# Altium PCB PCB1.PcbDoc (part 1 of 4)
Units mm, origin at the board's own origin, x right, y up, seen from the top; angles counter-clockwise.
Board outline 125 x 60 mm, 4 copper layers (Top Copper, Top Ref, Botton Ref, Bottom Copper), stack 1.586 mm thick; 166 components, 89 nets, 449 pads, 336 vias.
Unrouted connection lines stored in the file: 10.
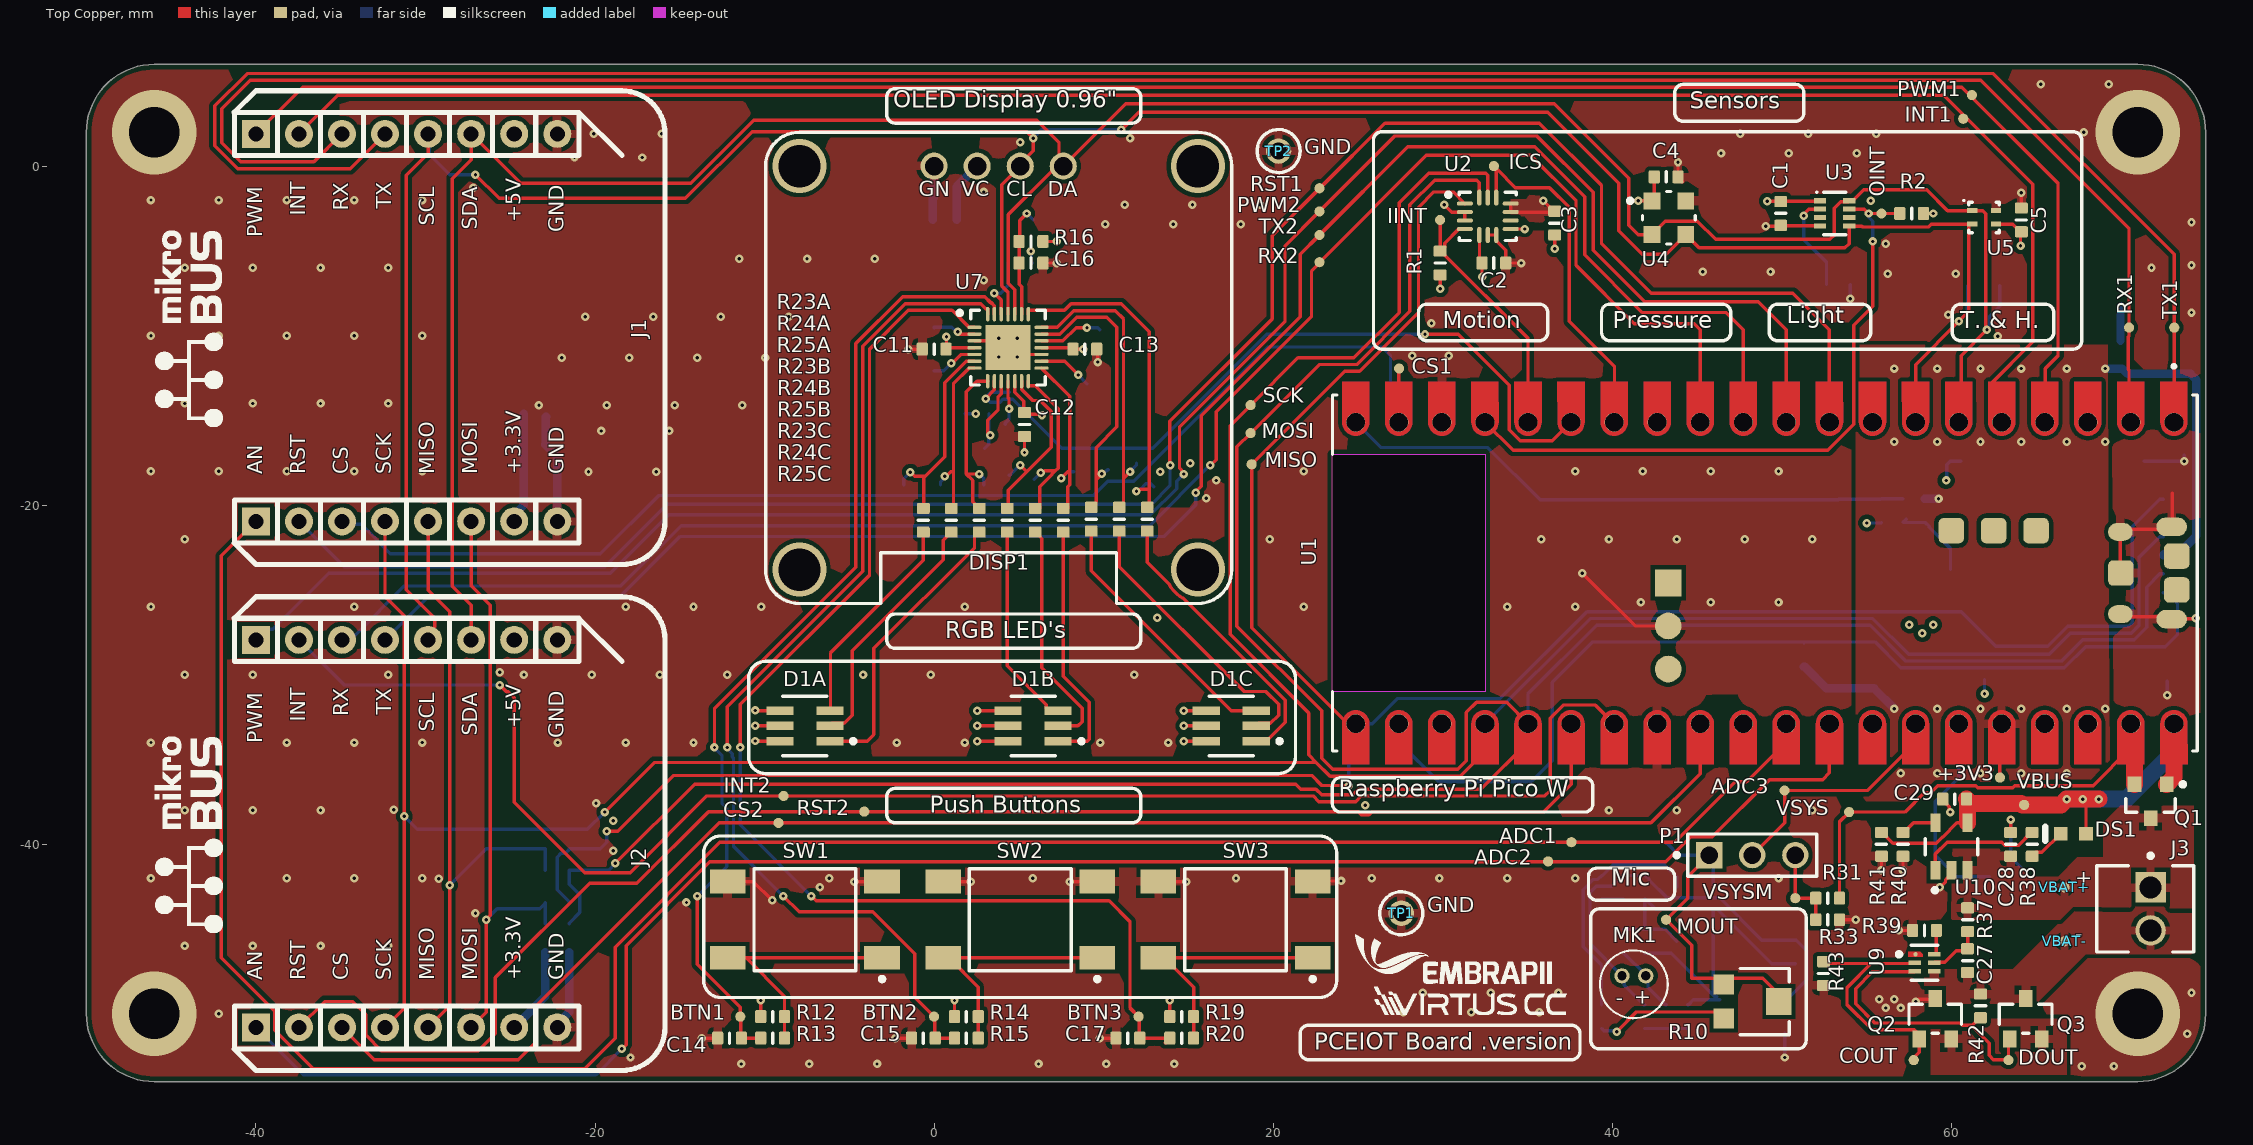
[diagram p0: Top Copper view]
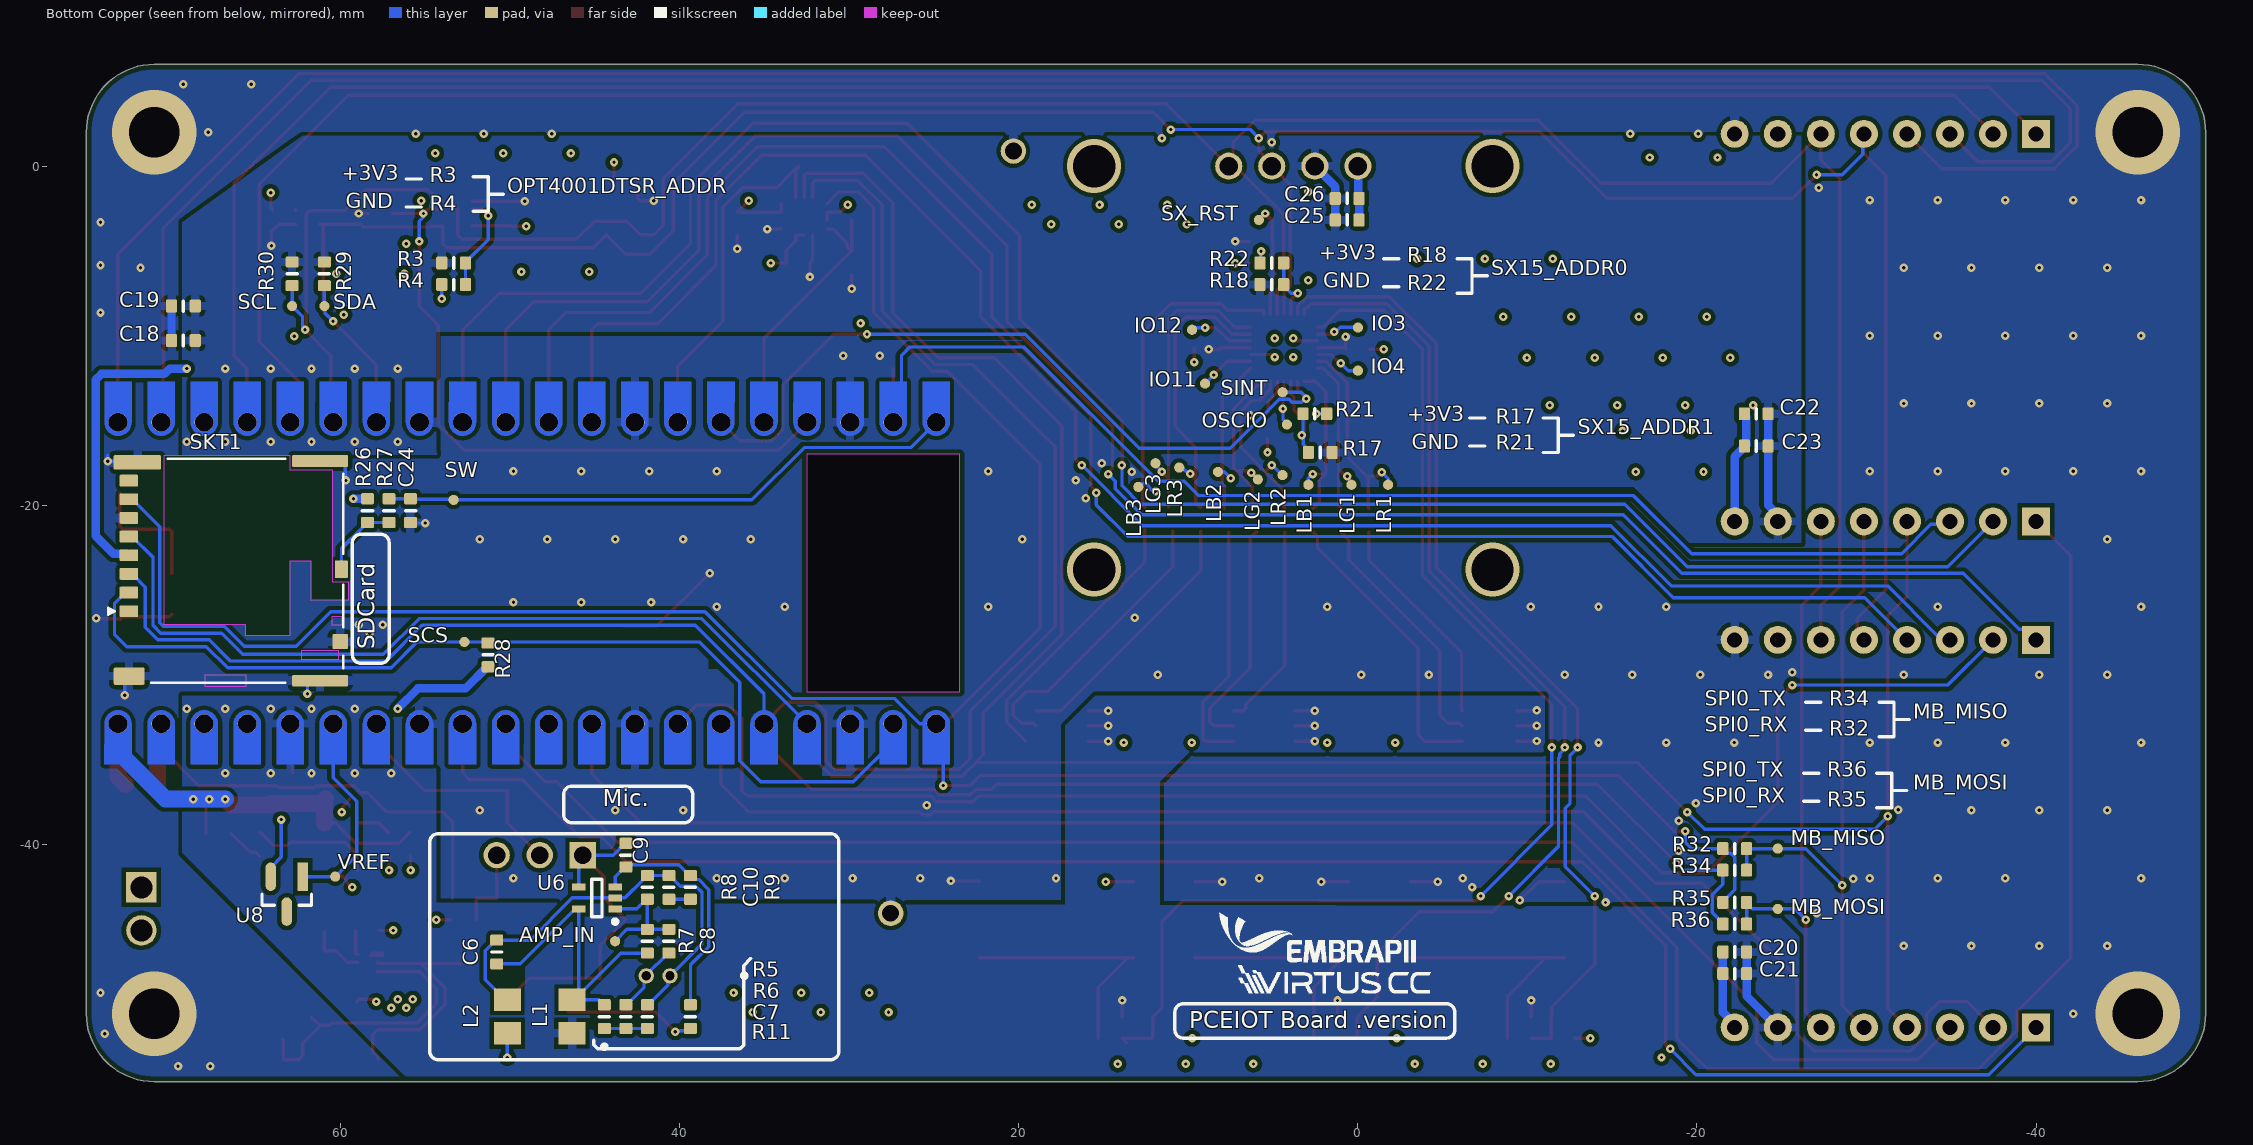
[diagram p1: Bottom Copper view, seen from below]
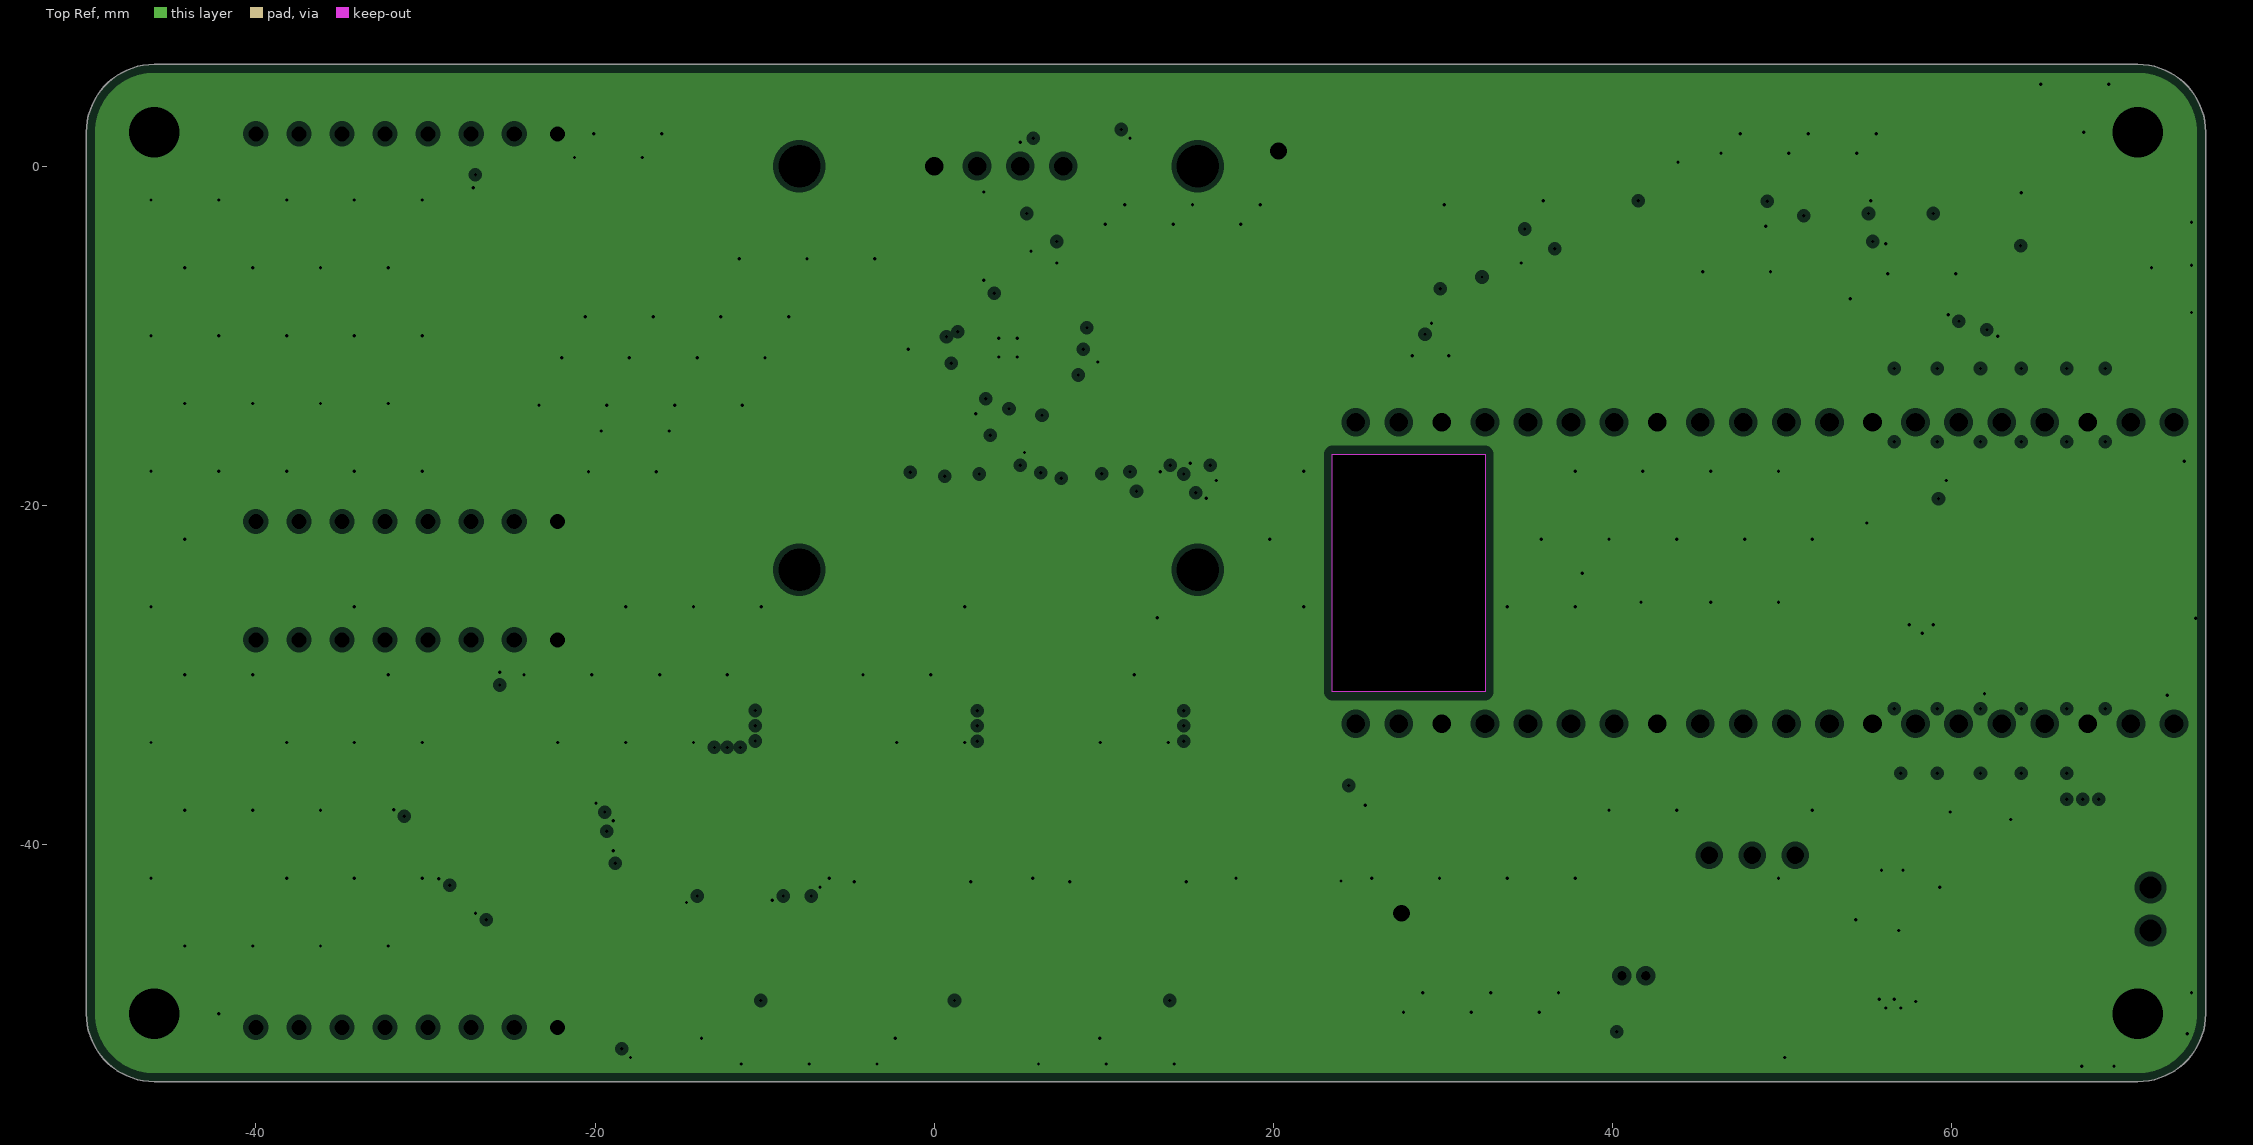
[diagram p2: Top Ref, clearances drawn from the general rule]
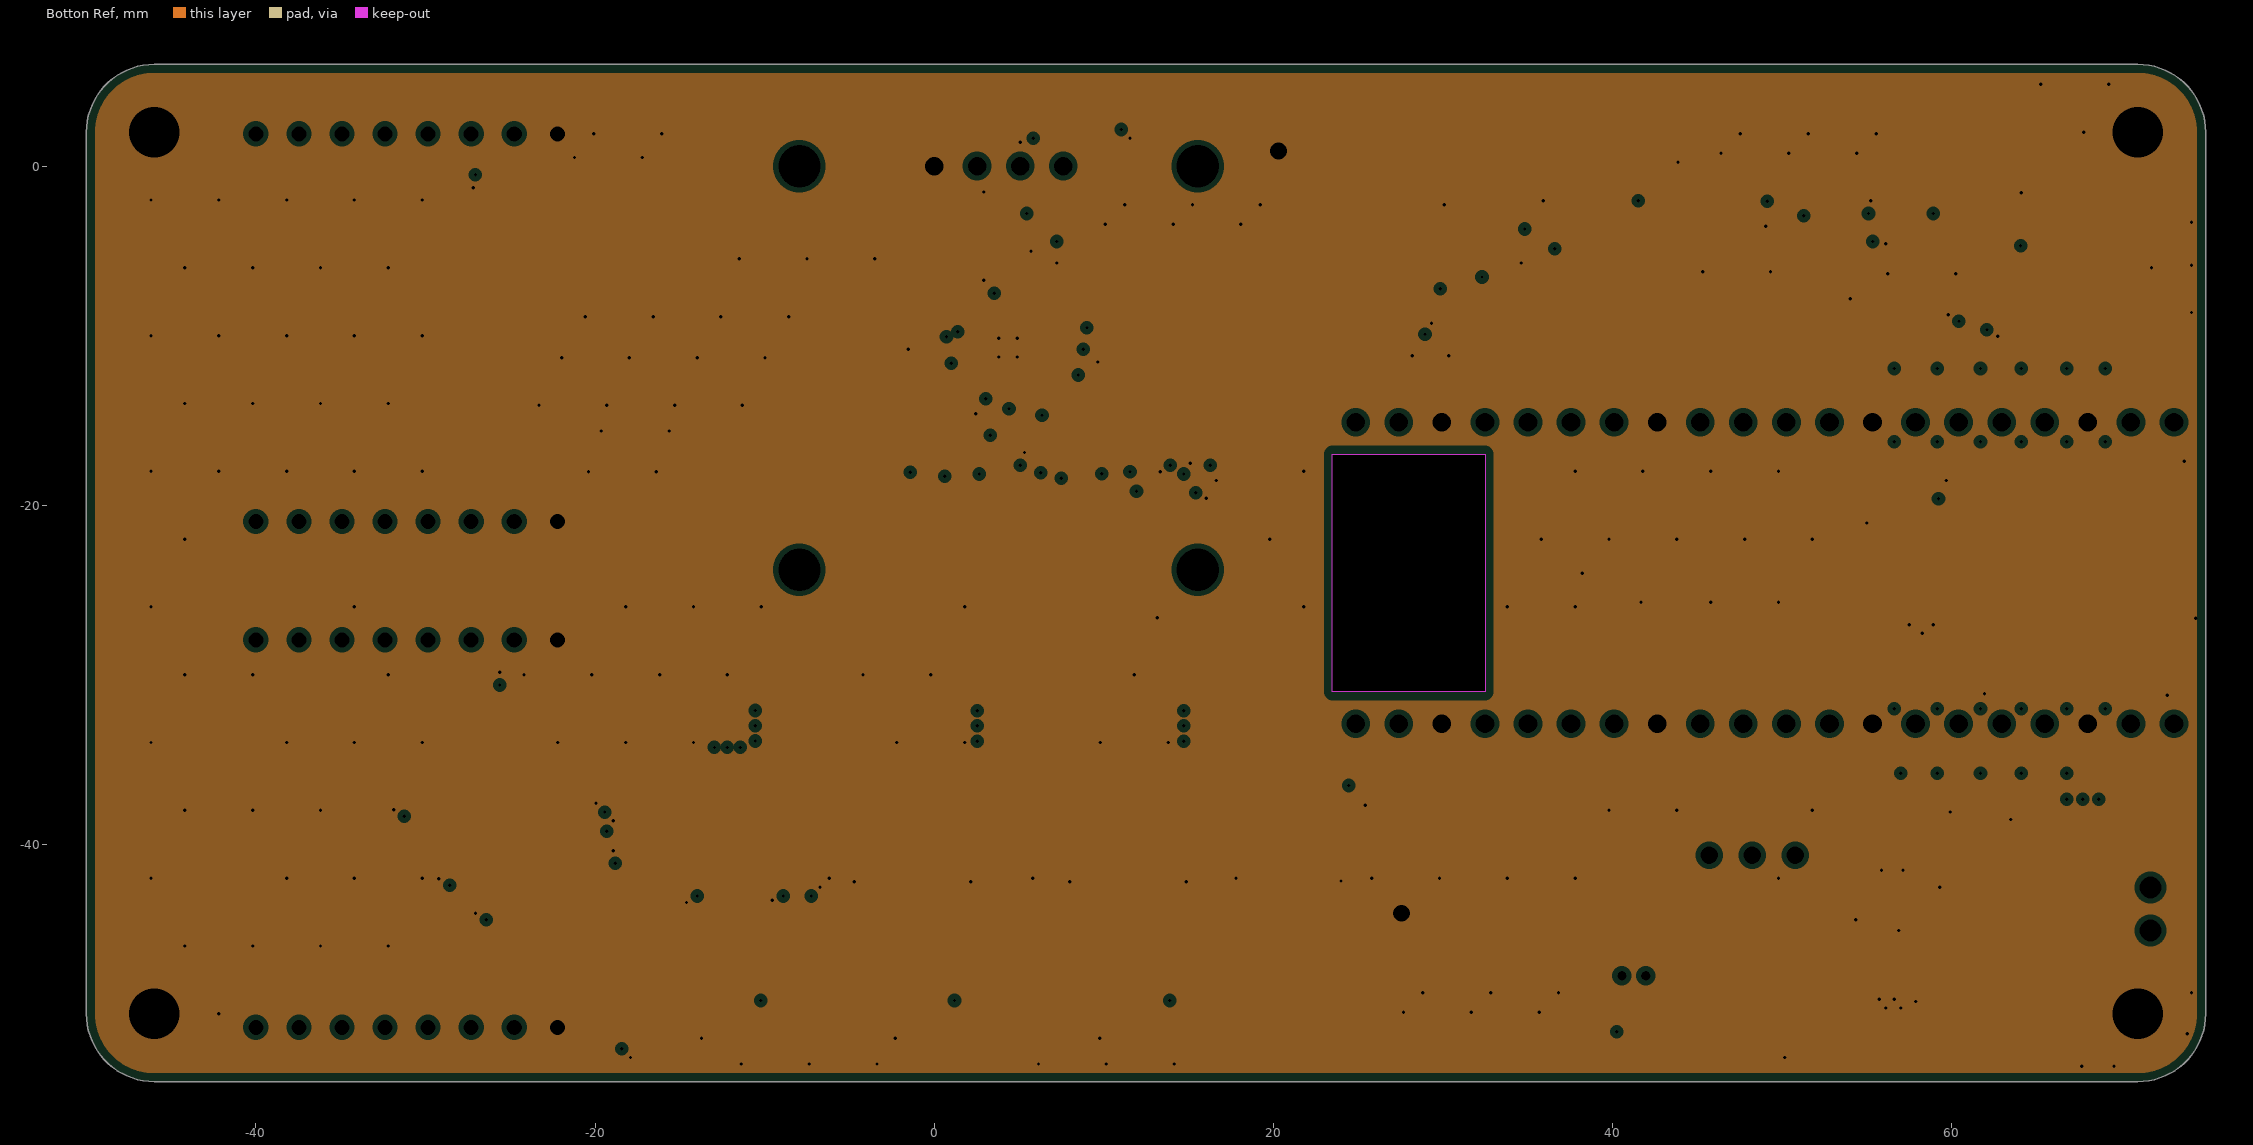
[diagram p3: Botton Ref, clearances drawn from the general rule]
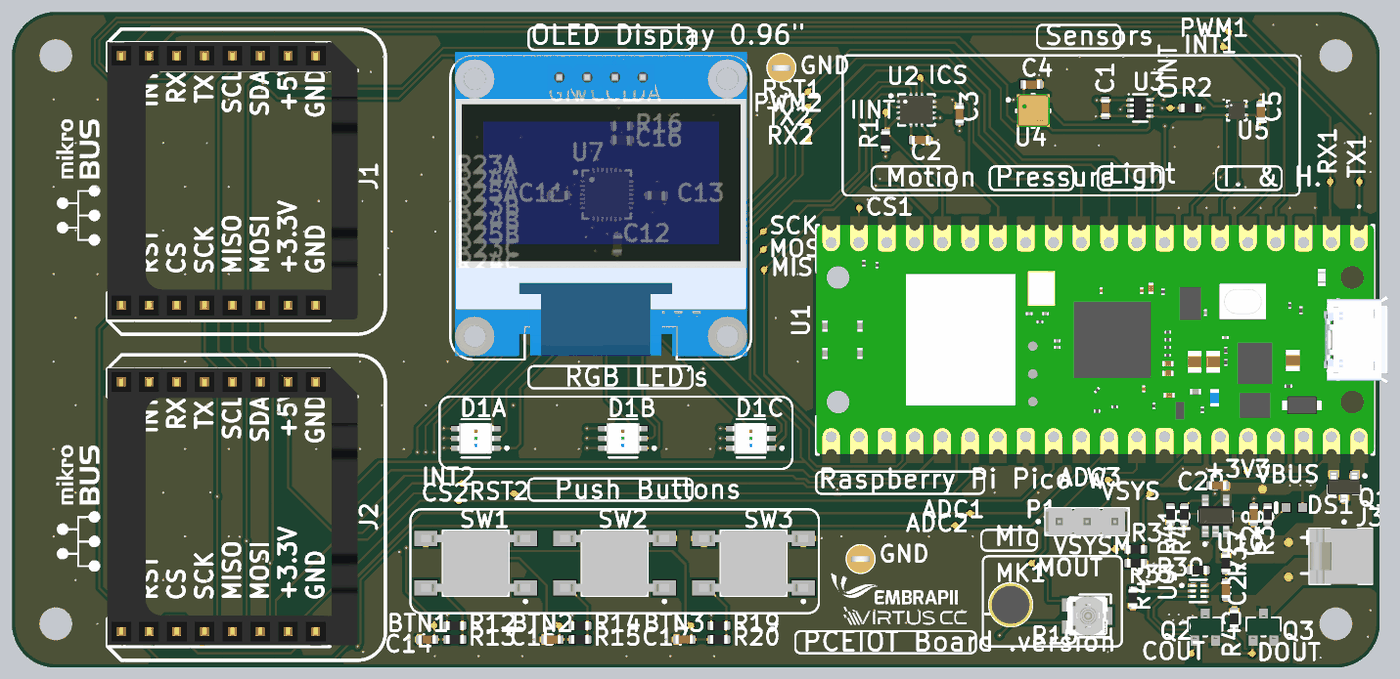
[diagram p6: 3D render of the assembled board from above, using the file's embedded part models]
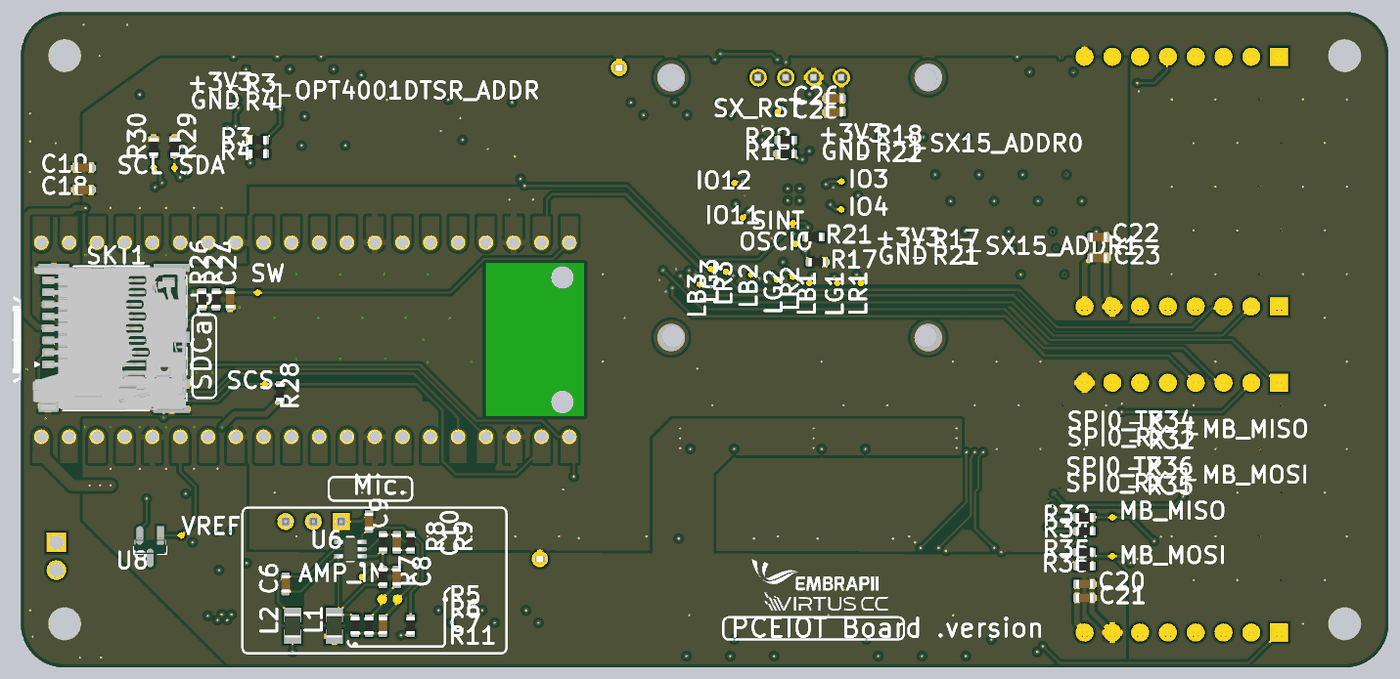
[diagram p7: 3D render of the assembled board from below, using the file's embedded part models]

## Layer stack, top to bottom
Top Mask: solder mask 0.0305, Solder Resist, Dk 3.8
Top Copper: signal copper 0.035
Dielectric 1: prepreg 0.2104, 7628, Dk 4.4
Top Ref: plane copper 0.0152, net GND
Core: core 1.065, FR-4, Dk 4.6
Botton Ref: plane copper 0.0152, net GND
Dielectric 2: prepreg 0.2104, 7628, Dk 4.4
Bottom Copper: signal copper 0.035
Bottom Mask: solder mask 0.0305, Solder Resist, Dk 3.8

## Board outline
-50,-50 -50,2 cw(c-46,2) -46,6 71,6 cw(c71,2) 75,2 75,-50 cw(c71,-50) 71,-54 -46,-54 cw(c-46,-50)

## Design rules (kind name [scope] priority, off if disabled: settings)
BoardOutlineClearance [All] p1: gap=0.3 ignorepadtopadclearanceinfootprint=FALSE except(0.4: Arc-SplitBarrior Arc-SplitContinuation Track-SplitBarrior Track-SplitContinuation SMDPad-SplitBarrior SMDPad-SplitContinuation THPad-SplitBarrior THPad-SplitContinuation Via-SplitBarrior Via-SplitContinuation Fill-SplitBarrior Fill-SplitContinuation Poly-SplitBarrior Poly-SplitContinuation Region-SplitBarrior Region-SplitContinuation Text-SplitBarrior Text-SplitContinuation)
Clearance "Clearance Different Nets" [All] p1: gap=0.2 ignorepadtopadclearanceinfootprint=FALSE except(0: Arc-Region Track-Region SMDPad-Region THPad-Region Via-Region Fill-Region Poly-Region Region-Region; 0.25: Arc-Poly Track-Poly SMDPad-Poly THPad-Poly Via-Poly Fill-Poly Poly-Poly)
Clearance "Clearance Bottom Layer" [OnLayer('Bottom Layer')] p2: gap=0.2 ignorepadtopadclearanceinfootprint=TRUE except(0: Arc-Region Track-Region SMDPad-Region THPad-Region Via-Region Fill-Region Poly-Region Region-Region; 0.25: Arc-Poly Track-Poly SMDPad-Poly THPad-Poly Via-Poly Fill-Poly Poly-Poly)
Clearance "Clearance Top Layer" [OnLayer('Top Layer')] p3: gap=0.2 ignorepadtopadclearanceinfootprint=TRUE except(0: Arc-Region Track-Region SMDPad-Region THPad-Region Via-Region Fill-Region Poly-Region Region-Region; 0.3: Arc-Poly Track-Poly SMDPad-Poly THPad-Poly Via-Poly Fill-Poly Poly-Poly)
HoleSize [All] p1: absolutevalues=TRUE maxlimit=6.3 minlimit=0.2 maxpercent=80.000 minpercent=20.000
MatchedLengths [InNetClass('SDCard')] p1: tolerance=0.5 checknetsindiffpair=FALSE checkdiffpairvsdiffpair=TRUE checkxsignals=TRUE checkothers=TRUE
MinimumAnnularRing [All] p1: minimumring=0.13
MinimumSolderMaskSliver [All] p1: minsoldermaskwidth=0.1
PlaneClearance [All] p1: clearance=0.3
PlaneConnect [All] p1: pad.planeconnectstyle=Relief pad.reliefexpansion=0.508 pad.reliefentries=4 pad.reliefconductorwidth=0.254 pad.reliefairgap=0.254 via.planeconnectstyle=Direct via.reliefexpansion=0.508 via.reliefentries=4 via.reliefconductorwidth=0.254 via.reliefairgap=0.254
PolygonConnect PolygonConnect_1 [All] p1: thpad.connectstyle=Relief thpad.reliefconductorwidth=0.508 thpad.reliefentries=4 thpad.polygonreliefangle="90 Angle" thpad.airgapwidth=0.254 smdpad.connectstyle=Relief smdpad.reliefconductorwidth=0.508 smdpad.reliefentries=4 smdpad.polygonreliefangle="90 Angle" smdpad.airgapwidth=0.254 via.connectstyle=Direct via.reliefconductorwidth=0.508 via.reliefentries=4 via.polygonreliefangle="90 Angle" via.airgapwidth=0.254
RoutingCorners [All] p1: cornerstyle=Round minsetback=2.54 maxsetback=2.54
RoutingVias [All] p1: holewidth=0.5 width=1 viastyle="Through Hole" minholewidth=0.2 minwidth=0.35 maxholewidth=5 maxwidth=5
SilkToSilkClearance [All] p1: silktosilkclearance=0.1
SilkToSolderMaskClearance [IsPad] p1: minsilkscreentomaskgap=0.1 clearancetoexposedcopper=TRUE
SolderMaskExpansion Vias [IsVia] p1: expansion=0.102 istentingtop=TRUE
SolderMaskExpansion [All] p2: expansion=0.102 istentingtop=FALSE
SupplyNets "Schematic Supply Nets_6" [InNet('AGND')] p1: voltage=0.000
SupplyNets "Schematic Supply Nets_5" [InNet('+3V3A')] p2: voltage=0.000
SupplyNets "Schematic Supply Nets_4" [InNet('VSYS')] p3: voltage=0.000
SupplyNets "Schematic Supply Nets_3" [InNet('VREF')] p4: voltage=0.000
SupplyNets "Schematic Supply Nets_2" [InNet('GND')] p5: voltage=0.000
SupplyNets "Schematic Supply Nets_1" [InNet('+3V3')] p6: voltage=0.000
SupplyNets "Schematic Supply Nets" [InNet('VBUS')] p7: voltage=0.000
UnRoutedNet [All] p1: checkbadconnections=TRUE
Width [All] p1: maxlimit=2.54 minlimit=0.089 preferedwidth=0.381
22 further rules are at their usual default settings.

## Classes and differential pairs
component class "[9] Mechanical": J4 J5 J6 J7 J8 J9 M1 M2 M3 M4 M5 M6 M7 M8 M9 M10 M11 M12
component class "[7] PowerManagement": .Designator C27 C28 C29 COUT DOUT DS1 J3 Q1 Q2 Q3 R37 R38 R39 R40 R41 R42 R43 U8 U9 U10 VBAT+ VBAT-
component class "[8] Conectors": .Designator C18 C19 C20 C21 C22 C23 C24 C25 C26 DISP1 J1 J2 R26 R27 R28 SKT1
channel class "[6] RgbLed": "\"RGB LED's\"1" "\"RGB LED's\"2" "\"RGB LED's\"3"
component class "[5] ButtonsAndLeds": .Designator BTN1 BTN2 BTN3 C11 C12 C13 C14 C15 C16 C17 IO3 IO4 IO11 IO12 LB1 LB2 LB3 LG1 LG2 LG3 LR1 LR2 LR3 OSCIO R12 R13 R14 R15 R16 R17 R18 R19 R20 R21 R22 SW1 SW2 SW3 SX_RST U7
component class "[4] Sensors": .Designator AMP_IN C1 C2 C3 C4 C5 C6 C7 C8 C9 C10 L1 L2 MK1 R1 R2 R3 R4 R5 R6 R7 R8 R9 R10 R11 U2 U3 U4 U5 U6
component class "[3] TopLevel": +3V3 .Designator ADC1 ADC2 ADC3 CS1 CS2 ICS IINT INT1 INT2 MB_MISO MB_MOSI MISO MOSI MOUT OINT P1 PWM1 PWM2 R29 R30 R31 R32 R33 R34 R35 R36 RST1 RST2 RX1 RX2 SCK SCL SCS SDA SINT SW TP1 TP2 TX1 TX2 U1 VBUS VREF VSYS VSYSM
component class "\"RGB LED's\"3": D1C R23C R24C R25C
component class "\"RGB LED's\"2": .Designator D1B R23B R24B R25B
component class "\"RGB LED's\"1": .Designator D1A R23A R24A R25A

## Components (designator, comment, footprint, x,y, rotation, side; value= is the part's Value field where it differs from the comment)
+3V3 "TPAD6R" TP06R 62.865,-36.068 r0 top
ADC1 "TPAD6R" TP06R 37.592,-39.878 r90 top
ADC2 "TPAD6R" TP06R 36.219,-41.011 r90 top
ADC3 "TPAD6R" TP06R 50.165,-36.83 r90 top
AMP_IN "TPAD6R" TP06R 43.815,-45.72 r90 bottom
BTN1 "TPAD6R" TP06R -11.43,-50.165 r270 top
BTN2 "TPAD6R" TP06R 0,-50.165 r270 top
BTN3 "TPAD6R" TP06R 12.065,-50.165 r270 top
C1 "VJ0603Y104MXJCW1BC" CAPC0603(1608)100_L 49.94,-2.79 r270 top value=100nF
C2 "VJ0603Y104MXJCW1BC" CAPC0603(1608)100_L 33.02,-5.715 r0 top value=100nF
C3 "VJ0603Y104MXJCW1BC" CAPC0603(1608)100_L 36.605,-3.36 r90 top value=100nF
C4 "VJ0603Y104MXJCW1BC" CAPC0603(1608)100_L 43.18,-0.635 r180 top value=100nF
C5 "VJ0603Y104MXJCW1BC" CAPC0603(1608)100_L 64.135,-3.175 r270 top value=100nF
C6 "VJ0603Y104MXJCW1BC" CAPC0603(1608)100_L 50.8,-46.355 r270 bottom value=100nF
C7 "VJ0603Y104MXJCW1BC" CAPC0603(1608)100_L 41.91,-50.165 r270 bottom value=100nF
C8 "VJ0603Y104MXJCW1BC" CAPC0603(1608)100_L 40.64,-45.72 r90 bottom value=100nF
C9 "C0603C101K5GACTU" CAPC0603(1608)100_L 43.18,-40.64 r90 bottom value=100pF
C10 "GRM188R60J106ME47D" CAPC0603(1608)100_L 40.64,-42.545 r270 bottom value=10uF
C11 "VJ0603Y104MXJCW1BC" CAPC0603(1608)100_L 0,-10.795 r0 top value=100nF
C12 "VJ0603Y104MXJCW1BC" CAPC0603(1608)100_L 5.334,-15.24 r90 top value=100nF
C13 "VJ0603Y104MXJCW1BC" CAPC0603(1608)100_L 8.89,-10.795 r180 top value=100nF
C14 "VJ0603Y104MXJCW1BC" CAPC0603(1608)100_L -12.065,-51.435 r0 top value=100nF
C15 "VJ0603Y104MXJCW1BC" CAPC0603(1608)100_L -0.635,-51.435 r0 top value=100nF
C16 "VJ0603Y104MXJCW1BC" CAPC0603(1608)100_L 5.715,-5.715 r180 top value=100nF
C17 "VJ0603Y104MXJCW1BC" CAPC0603(1608)100_L 11.43,-51.435 r0 top value=100nF
C18 "VJ0603Y104MXJCW1BC" CAPC0603(1608)100_L 69.28,-10.287 r180 bottom value=100nF
C19 "VJ0603Y104MXJCW1BC" CAPC0603(1608)100_L 69.28,-8.255 r180 bottom value=100nF
C20 "VJ0603Y104MXJCW1BC" CAPC0603(1608)100_L -22.225,-46.355 r180 bottom value=100nF
C21 "VJ0603Y104MXJCW1BC" CAPC0603(1608)100_L -22.225,-47.625 r180 bottom value=100nF
C22 "VJ0603Y104MXJCW1BC" CAPC0603(1608)100_L -23.495,-14.605 r180 bottom value=100nF
C23 "VJ0603Y104MXJCW1BC" CAPC0603(1608)100_L -23.495,-16.51 r180 bottom value=100nF
C24 "VJ0603Y103KXAAC" CAPC0603(1608)100_L 55.88,-20.32 r90 bottom value=10nF
C25 "VJ0603Y104MXJCW1BC" CAPC0603(1608)100_L 0.635,-3.175 r0 bottom value=100nF
C26 "VJ0603Y104MXJCW1BC" CAPC0603(1608)100_L 0.635,-1.905 r0 bottom value=100nF
C27 "VJ0603Y104MXJCW1BC" CAPC0603(1608)100_L 60.96,-46.863 r90 top value=100nF
C28 "Capacitor 4.7µF +/-20% 10V 0603" CAPC0603(1608)100_L 63.5,-40.005 r270 top value=4.7µF
C29 "Capacitor 4.7µF +/-20% 10V 0603" CAPC0603(1608)100_L 60.198,-37.338 r0 top value=4.7µF
COUT "TPAD6R" TP06R 57.785,-52.73 r90 top
CS1 "TPAD6R" TP06R 27.432,-11.938 r90 top
CS2 "TPAD6R" TP06R -9.175,-38.74 r0 top
D1A "ASMT-YTB7-0AA02" FP-PLCC-6-MFG -7.62,-33.02 r180 top (schematic designator D1)
D1B "ASMT-YTB7-0AA02" FP-PLCC-6-MFG 5.842,-33.02 r180 top (schematic designator D1)
D1C "ASMT-YTB7-0AA02" FP-PLCC-6-MFG 17.526,-33.02 r180 top (schematic designator D1)
DISP1 "0.96” Display Module" "New footprint 1"#1 3.81,0 r0 top locked
DOUT "TPAD6R" TP06R 63.373,-52.73 r90 top
DS1 "19-217/R6C-AL1M2VY/3T" EVRL-0603-2_V 67.195,-39.37 r180 top
ICS "TPAD6R" TP06R 33.02,0 r90 top
IINT "TPAD6R" TP06R 29.845,-3.175 r90 top
INT1 "TPAD6R" TP06R 60.706,2.794 r90 top
INT2 "TPAD6R" TP06R -8.874,-37.15 r90 top
IO3 "TPAD6R" TP06R 0,-9.525 r90 bottom
IO4 "TPAD6R" TP06R 0,-12.065 r90 bottom
IO11 "TPAD6R" TP06R 9.017,-12.827 r90 bottom
IO12 "TPAD6R" TP06R 9.779,-9.652 r90 bottom
J1 "MikroBus Connector" "New footprint 1"#2 -31.115,-9.525 r90 top locked
J2 "MikroBus Connector" "New footprint 1"#2 -31.115,-39.37 r90 top locked
J3 "640456-2" TECO-640456-2_V 71.755,-43.815 r90 top locked
L1 "BLM21PG331SN1D" INDC2013X105X50ML20T20 46.355,-50.165 r90 bottom
L2 "BLM21PG331SN1D" INDC2013X105X50ML20T20 50.165,-50.165 r270 bottom
LB1 "TPAD6R" TP06R 2.921,-18.796 r0 bottom
LB2 "TPAD6R" TP06R 8.255,-18.034 r90 bottom
LB3 "TPAD6R" TP06R 12.954,-18.923 r90 bottom
LG1 "TPAD6R" TP06R 0.381,-18.796 r90 bottom
LG2 "TPAD6R" TP06R 5.906,-18.479 r0 bottom
LG3 "TPAD6R" TP06R 11.938,-17.526 r90 bottom
LR1 "TPAD6R" TP06R -1.778,-18.796 r90 bottom
LR2 "TPAD6R" TP06R 4.445,-18.224 r90 bottom
LR3 "TPAD6R" TP06R 10.541,-17.78 r90 bottom
MB_MISO "TPAD6R" TP06R -24.765,-40.259 r0 bottom
MB_MOSI "TPAD6R" TP06R -24.765,-43.815 r180 bottom
MISO "TPAD6R" TP06R 18.733,-17.59 r270 top
MK1 "CMEJ-0415-42-LP" MIC_CMEJ-0415-42-LP 41.275,-48.26 r180 top
MOSI "TPAD6R" TP06R 18.669,-15.748 r0 top
MOUT "TPAD6R" TP06R 43.18,-44.45 r90 top
OINT "TPAD6R" TP06R 55.88,-2.794 r90 top
OSCIO "TPAD6R" TP06R 4.191,-15.24 r90 bottom
P1 "22-28-4033" MOLX-22-28-4033_V 48.26,-40.64 r0 top
PWM1 "TPAD6R" TP06R 61.214,4.191 r180 top
PWM2 "TPAD6R" TP06R 22.733,-2.667 r270 top
Q1 "NTRV4101PT1G" ONSC-SOT-23-3-318-08_V 71.755,-37.465 r270 top
Q2 "DMN1019USN-7" FP-SC59-MFG 59.055,-50.292 r90 top value=2.426E-09F
Q3 "DMN1019USN-7" FP-SC59-MFG 64.389,-50.292 r90 top value=2.426E-09F
R1 "Resistor 10k +/-1% 0603 100 mW" RESC0603(1608)_L 29.845,-5.715 r270 top value=10k
R2 "Resistor 10k +/-1% 0603 100 mW" RESC0603(1608)_L 57.658,-2.794 r0 top value=10k
R3 "Resistor 0R +/- 5% 0603 100 mW" RESC0603(1608)_L 53.34,-5.715 r0 bottom value=0
R4 "Resistor 0R +/- 5% 0603 100 mW" RESC0603(1608)_L 53.34,-6.985 r0 bottom value=0
R5 "Resistor 1k +/-1% 0603 100 mW" RESC0603(1608)_L 44.45,-50.165 r90 bottom value=1k
R6 "Resistor 1k +/-1% 0603 100 mW" RESC0603(1608)_L 43.18,-50.165 r270 bottom value=1k
R7 "Resistor 100k +/-1% 0603 100 mW" RESC0603(1608)_L 41.91,-45.72 r270 bottom value=100k
R8 "Resistor 100k +/-1% 0603 100 mW" RESC0603(1608)_L 41.91,-42.545 r270 bottom value=100k
R9 "Resistor 1k +/-1% 0603 100 mW" RESC0603(1608)_L 39.37,-42.545 r90 bottom value=1k
R10 "TC33X-2-104E" FP-TC33X-2-MFG 48.26,-49.276 r270 top value=100kR
R11 "CRCW06032K20FKEA" RESC0603(1608)_L 39.37,-50.165 r270 bottom value=2.2kR
R12 "Resistor 10k +/-1% 0603 100 mW" RESC0603(1608)_L -9.525,-50.165 r180 top value=10k
R13 "Resistor 10k +/-1% 0603 100 mW" RESC0603(1608)_L -9.525,-51.435 r180 top value=10k
R14 "Resistor 10k +/-1% 0603 100 mW" RESC0603(1608)_L 1.905,-50.165 r180 top value=10k
R15 "Resistor 10k +/-1% 0603 100 mW" RESC0603(1608)_L 1.905,-51.435 r180 top value=10k
R16 "Resistor 10k +/-1% 0603 100 mW" RESC0603(1608)_L 5.715,-4.445 r0 top value=10k
R17 "Resistor 0R +/- 5% 0603 100 mW" RESC0603(1608)_L 2.221,-16.891 r0 bottom value=0
R18 "Resistor 0R +/- 5% 0603 100 mW" RESC0603(1608)_L 5.08,-6.985 r180 bottom value=0
R19 "Resistor 10k +/-1% 0603 100 mW" RESC0603(1608)_L 14.605,-50.165 r180 top value=10k
R20 "Resistor 10k +/-1% 0603 100 mW" RESC0603(1608)_L 14.605,-51.435 r180 top value=10k
R21 "Resistor 0R +/- 5% 0603 100 mW" RESC0603(1608)_L 2.54,-14.605 r180 bottom value=0
R22 "Resistor 0R +/- 5% 0603 100 mW" RESC0603(1608)_L 5.08,-5.715 r0 bottom value=0
R23A "ERJ-3GEYJ301V" RESC0603(1608)_L -0.635,-20.89 r90 top value=300R (schematic designator R23)
R23B "ERJ-3GEYJ301V" RESC0603(1608)_L 4.318,-20.89 r90 top value=300R (schematic designator R23)
R23C "ERJ-3GEYJ301V" RESC0603(1608)_L 9.271,-20.825 r90 top value=300R (schematic designator R23)
R24A "ERJ-3EKF1000V" RESC0603(1608)_L 1.016,-20.89 r90 top value=100R (schematic designator R24)
R24B "ERJ-3EKF1000V" RESC0603(1608)_L 5.969,-20.89 r90 top value=100R (schematic designator R24)
R24C "ERJ-3EKF1000V" RESC0603(1608)_L 10.922,-20.825 r90 top value=100R (schematic designator R24)
R25A "ERJ-3EKF1000V" RESC0603(1608)_L 2.667,-20.89 r90 top value=100R (schematic designator R25)
R25B "ERJ-3EKF1000V" RESC0603(1608)_L 7.62,-20.89 r90 top value=100R (schematic designator R25)
R25C "ERJ-3EKF1000V" RESC0603(1608)_L 12.573,-20.825 r90 top value=100R (schematic designator R25)
R26 "Resistor 10k +/-1% 0603 100 mW" RESC0603(1608)_L 58.42,-20.32 r270 bottom value=10k
R27 "Resistor 10k +/-1% 0603 100 mW" RESC0603(1608)_L 57.15,-20.32 r90 bottom value=10k
R28 "Resistor 10k +/-1% 0603 100 mW" RESC0603(1608)_L 51.308,-28.829 r90 bottom value=10k
R29 "Resistor 10k +/-1% 0603 100 mW" RESC0603(1608)_L 60.96,-6.35 r90 bottom value=10k
R30 "Resistor 10k +/-1% 0603 100 mW" RESC0603(1608)_L 62.865,-6.35 r90 bottom value=10k
R31 "Resistor 10k +/-1% 0603 100 mW" RESC0603(1608)_L 52.705,-43.18 r0 top value=10k
R32 "Resistor 0R +/- 5% 0603 100 mW" RESC0603(1608)_L -22.225,-40.259 r0 bottom value=0
R33 "Resistor 1k +/-1% 0603 100 mW" RESC0603(1608)_L 52.705,-44.45 r180 top value=1k
R34 "Resistor 0R +/- 5% 0603 100 mW" RESC0603(1608)_L -22.225,-41.529 r0 bottom value=0
R35 "Resistor 0R +/- 5% 0603 100 mW" RESC0603(1608)_L -22.225,-43.434 r0 bottom value=0
R36 "Resistor 0R +/- 5% 0603 100 mW" RESC0603(1608)_L -22.225,-44.704 r0 bottom value=0
R37 "ERJ-3EKF3300V" RESC0603(1608)_L 60.96,-44.45 r90 top value=330R
R38 "CRCW0603470RJNEA" RESC0603(1608)_L 64.77,-40.005 r90 top value=470R
R39 "CRCW06032K20FKEA" RESC0603(1608)_L 58.42,-45.085 r0 top value=2.2kR
R40 "ERJ-3EKF2001V" RESC0603(1608)_L 57.15,-40.005 r90 top value=2kR
R41 "Resistor 10k +/-1% 0603 100 mW" RESC0603(1608)_L 55.88,-40.005 r90 top value=10k
R42 "ERJ-3GEYJ475V" RESC0603(1608)_L 61.722,-49.53 r270 top value=4.7MR
R43 "ERJ-3GEYJ475V" RESC0603(1608)_L 52.451,-47.625 r90 top value=4.7MR
RST1 "TPAD6R" TP06R 22.733,-1.305 r0 top
RST2 "TPAD6R" TP06R -4.116,-38.071 r90 top
RX1 "TPAD6R" TP06R 70.485,-9.525 r90 top
RX2 "TPAD6R" TP06R 22.733,-5.667 r270 top
SCK "TPAD6R" TP06R 18.669,-14.097 r270 top
SCL "TPAD6R" TP06R 60.96,-8.255 r180 bottom
SCS "TPAD6R" TP06R 52.705,-28.067 r90 bottom
SDA "TPAD6R" TP06R 62.865,-8.255 r0 bottom
SINT "TPAD6R" TP06R 4.445,-13.335 r270 bottom
SKT1 "5033981892" MOLX-5033981892_V 66.224,-23.873 r90 bottom
SW "TPAD6R" TP06R 53.34,-19.685 r90 bottom
SW1 "FSM4JSMA" TECO-FSM4JSMA_V -7.62,-44.45 r270 top
SW2 "FSM4JSMA" TECO-FSM4JSMA_V 5.08,-44.45 r270 top
SW3 "FSM4JSMA" TECO-FSM4JSMA_V 17.78,-44.45 r270 top
SX_RST "TPAD6R" TP06R 5.842,-3.175 r90 bottom
TP1 "5003" KSTN-5003 27.559,-44.069 r0 top
TP2 "5003" KSTN-5003 20.32,0.889 r0 top
TX1 "TPAD6R" TP06R 73.152,-9.525 r90 top
TX2 "TPAD6R" TP06R 22.733,-4.064 r270 top
U1 "SC0918" MODULE_SC0918 24.872,-15.107 r270 top locked
U2 "ICM-42670-P" QFN50P300X250X81-14N 32.66,-2.96 r0 top
U3 "OPT4001DTSR" SON50P130X60-8N 53.115,-2.79 r0 top
U4 "MS563702BA03-50" FP-MS563702BA03-50-MFG 43.336,-3.044 r0 top
U5 "SHT40I-AD1B-R3" QFN80P150X150X55-4N 61.94,-3.025 r0 top
U6 "MAX4466EXK-T" SOT65P200X110-5N 44.89,-43.165 r0 bottom
U7 "SX1509BIULTRT" QFN40P410X410X60_HS-29N 4.36,-10.71 r0 top
U8 "LM4040DYM3-2.5-TR" FP-SOT23-3LD-PL-1-IPC_A 63.18,-42.94 r270 bottom
U9 "BQ29700DSER" FP-DSE0006A-MFG 58.42,-46.99 r0 top
U10 "MCP73831T-2ACI/OT" FP-C04-091-OT-MFG 60.01,-40.135 r90 top
VBAT+ "TPAD6R" TP06R 66.675,-42.545 r180 top
VBAT- "TPAD6R" TP06R 66.675,-45.72 r180 top
VBUS "TPAD6R" TP06R 64.298,-37.677 r90 top
VREF "TPAD6R" TP06R 60.325,-41.91 r90 bottom
VSYS "TPAD6R" TP06R 53.975,-38.1 r0 top
VSYSM "TPAD6R" TP06R 50.8,-43.18 r90 top

## Footprints (in the part's own frame and the unit in brackets; to place one, negate y for a bottom-side part, rotate by r counter-clockwise, add the part's x,y. Pads: shape width x height; smd on the part's side, far side on the other; paste and mask are expansions set on the pad)
CAPC0603(1608)100_L [mm] "Chip Capacitor, Body 1.6x0.8mm, Height 1.0mm, IPC High Density"
  rrect25% 0.66x0.76 smd: 1(-0.7,0) 2(0.7,0)
  silkscreen extent 0,-0.3 0,0.3, body extent -0.8,-0.4 0.8,0.4, height 0.95
EVRL-0603-2_V [mm] "SMD, 2-Leads, Body 1.6x0.8mm"
  rect 0.8x0.8 smd: 1(-0.75,0) 2(0.75,0)
  silkscreen extent 1.65,-0.4 1.65,0.4, body extent -0.8,-0.4 0.8,0.4, height 0.5
FP-C04-091-OT-MFG [mm]
  rect 1.1x0.6 smd paste+0 mask+0: 1(-1.4,0.95) 2(-1.4,0) 3(-1.4,-0.95) 4(1.4,-0.95) 5(1.4,0.95)
  silkscreen extent -2.7,-1.55 0.48,1.55, body extent -1.6,-1.55 1.6,1.55, height 1.45
FP-DSE0006A-MFG [mm]
  round 0.252 smd paste-1000 mask+0: 1(-0.525,0.5)
  rect 0.75x0.28 smd paste-1000 mask+0: 2(-0.575,0) 3(-0.575,-0.5) 4(0.575,-0.5) 5(0.575,0) 6(0.575,0.5)
  Top Copper region: -0.95,0.64 -0.24,0.64 -0.1,0.5 -0.1,0.36 -0.95,0.36
  silkscreen extent -1.62,-1.02 0.77,1.02, body extent -1.05,-0.87 1.05,0.87, height 0.25
FP-MS563702BA03-50-MFG [mm]
  rect 1x1 smd paste+0 mask+0.001: 1(-1,1) 2(-1,-1) 3(1,-1) 4(1,1)
  silkscreen extent -2.4,-1.55 1.55,1.55, body extent -1.65,-1.65 1.65,1.65, height 0.25
FP-PLCC-6-MFG [mm]
  rect 1.6x0.5 smd paste+0 mask+0.05: 1(-1.475,0.9) 2(-1.475,0) 3(-1.475,-0.9) 4(1.475,-0.9) 5(1.475,0) 6(1.475,0.9)
  silkscreen extent -2.98,-1.75 1.3,1.75, body extent -2.37,-1.6 2.37,1.6, height 0.25
FP-SC59-MFG [mm]
  rect 1x0.8 smd paste+0 mask+0: 1(-1.2,0.95) 2(-1.2,-0.95) 3(1.2,0)
  silkscreen extent -0.85,-1.55 0.85,1.55, body extent -1.8,-1.65 1.8,1.65, height 0.25
FP-SOT23-3LD-PL-1-IPC_A [mm]
  rect 1.684x0.627 smd paste+0 mask+0: 1(-1.03,0.95)
  rrect100% 1.684x0.627 smd paste+0 mask+0: 2(-1.03,-0.95) 3(1.03,0)
  silkscreen extent 0,-1.46 0.65,1.46, body extent -1.2,-1.46 1.2,1.46, height 1.1
FP-TC33X-2-MFG [mm]
  rect 1.2x1.2 smd paste+0 mask+0: 1(-1,-1.675) 3(1,-1.675)
  rect 1.6x1.5 smd paste+0 mask+0: 2(0,1.575)
  silkscreen extent -1.95,-0.7 1.95,2.17, body extent -2.05,-2.37 2.05,2.42, height 0.25
INDC2013X105X50ML20T20 [mm] "Chip Inductor, 2-Leads, Body 2.2x1.45mm, IPC Low Density"
  rect 1.33x1.57 smd: 1(-0.985,0) 2(0.985,0)
  body extent -1.1,-0.72 1.1,0.72, height 1.05
KSTN-5003 [mm] "Test Point, Through Hole, Dia 2.54mm"
  round 1.5 hole 1: 1(0,0)
  silkscreen extent -1.27,-1.27 1.27,1.27, body extent -1.27,-1.27 1.27,1.27, height 4.57
MIC_CMEJ-0415-42-LP [mm]
  round 0.9 hole 0.55: N(0.7,-0.5) P(-0.7,-0.5)
  silkscreen extent -2,-2 2,2, body extent -2,-2 2,2, height 1.88
MODULE_SC0918 [mm]
  round 1.125 hole 1.1 paste+0: 1(0,48.26) 2(0,45.72) 3(0,43.18) 4(0,40.64) 5(0,38.1) 6(0,35.56) 7(0,33.02) 8(0,30.48) 9(0,27.94) 10(0,25.4) 11(0,22.86) 12(0,20.32) 13(0,17.78) 14(0,15.24) 15(0,12.7) 16(0,10.16) 17(0,7.62) 18(0,5.08) 19(0,2.54) 20(0,0) 21(17.78,0) 22(17.78,2.54) 23(17.78,5.08) 24(17.78,7.62) 25(17.78,10.16) 26(17.78,12.7) 27(17.78,15.24) 28(17.78,17.78) 29(17.78,20.32) 30(17.78,22.86) 31(17.78,25.4) 32(17.78,27.94) 33(17.78,30.48) 34(17.78,33.02) 35(17.78,35.56) 36(17.78,38.1) 37(17.78,40.64) 38(17.78,43.18) 39(17.78,45.72) 40(17.78,48.26)
  oval 1.1x1.8 smd: A(6.168,48.128) B(11.618,48.128)
  oval 1.05x1.45 smd: C(6.468,45.098) D(11.318,45.098)
  rect 1.575x1.575 smd: E(9.477,18.428)
  round 1.575 smd: F(12.017,18.428) G(14.557,18.428)
  rrect40% 1.5x1.5 smd: TP1(8.893,45.128) TP2(9.893,48.428) TP3(7.893,48.428) TP4(6.393,40.128) TP5(6.393,37.628) TP6(6.393,35.128)
  Top Copper region: 0,24.6 -2.397,24.598 -2.397,26.198 0,26.2 0.306,26.139 0.566,25.966 0.739,25.706 0.8,25.4 0.8,25.4 0.739,25.094 0.566,24.834 0.306,24.661 0,24.6
  Top Copper region: 0,19.52 -2.397,19.518 -2.397,21.118 0,21.12 0.306,21.059 0.566,20.886 0.739,20.626 0.8,20.32 0.8,20.32 0.739,20.014 0.566,19.754 0.306,19.581 0,19.52
  Top Copper region: 0,22.06 -2.397,22.058 -2.397,23.658 0,23.66 0.306,23.599 0.566,23.426 0.739,23.166 0.8,22.86 0.8,22.86 0.739,22.554 0.566,22.294 0.306,22.121 0,22.06
  Top Copper region: 0,27.14 -2.397,27.138 -2.397,28.738 0,28.74 0.306,28.679 0.566,28.506 0.739,28.246 0.8,27.94 0.8,27.94 0.739,27.634 0.566,27.374 0.306,27.201 0,27.14
  Top Copper region: 0,47.46 -2.397,47.458 -2.397,49.058 0,49.06 0.306,48.999 0.566,48.826 0.739,48.566 0.8,48.26 0.8,48.26 0.739,47.954 0.566,47.694 0.306,47.521 0,47.46
  Top Copper region: 17.78,0.8 20.177,0.802 20.177,-0.798 17.78,-0.8 17.474,-0.739 17.214,-0.566 17.041,-0.306 16.98,0 16.98,0 17.041,0.306 17.214,0.566 17.474,0.739 17.78,0.8
  Top Copper region: 17.78,49.06 20.177,49.062 20.177,47.462 17.78,47.46 17.474,47.521 17.214,47.694 17.041,47.954 16.98,48.26 16.98,48.26 17.041,48.566 17.214,48.826 17.474,48.999 17.78,49.06
  Top Copper region: 17.78,46.52 20.177,46.522 20.177,44.922 17.78,44.92 17.474,44.981 17.214,45.154 17.041,45.414 16.98,45.72 16.98,45.72 17.041,46.026 17.214,46.286 17.474,46.459 17.78,46.52
  Top Copper region: 17.78,43.98 20.177,43.982 20.177,42.382 17.78,42.38 17.474,42.441 17.214,42.614 17.041,42.874 16.98,43.18 16.98,43.18 17.041,43.486 17.214,43.746 17.474,43.919 17.78,43.98
  Top Copper region: 17.78,41.44 20.177,41.442 20.177,39.842 17.78,39.84 17.474,39.901 17.214,40.074 17.041,40.334 16.98,40.64 16.98,40.64 17.041,40.946 17.214,41.206 17.474,41.379 17.78,41.44
  Top Copper region: 17.78,38.9 20.177,38.902 20.177,37.302 17.78,37.3 17.474,37.361 17.214,37.534 17.041,37.794 16.98,38.1 16.98,38.1 17.041,38.406 17.214,38.666 17.474,38.839 17.78,38.9
  Top Copper region: 17.78,36.36 20.177,36.362 20.177,34.762 17.78,34.76 17.474,34.821 17.214,34.994 17.041,35.254 16.98,35.56 16.98,35.56 17.041,35.866 17.214,36.126 17.474,36.299 17.78,36.36
  Top Copper region: 17.78,33.82 20.177,33.822 20.177,32.222 17.78,32.22 17.474,32.281 17.214,32.454 17.041,32.714 16.98,33.02 16.98,33.02 17.041,33.326 17.214,33.586 17.474,33.759 17.78,33.82
  Top Copper region: 17.78,31.28 20.177,31.282 20.177,29.682 17.78,29.68 17.474,29.741 17.214,29.914 17.041,30.174 16.98,30.48 16.98,30.48 17.041,30.786 17.214,31.046 17.474,31.219 17.78,31.28
  Top Copper region: 17.78,28.74 20.177,28.742 20.177,27.142 17.78,27.14 17.474,27.201 17.214,27.374 17.041,27.634 16.98,27.94 16.98,27.94 17.041,28.246 17.214,28.506 17.474,28.679 17.78,28.74
  Top Copper region: 17.78,26.2 20.177,26.202 20.177,24.602 17.78,24.6 17.474,24.661 17.214,24.834 17.041,25.094 16.98,25.4 16.98,25.4 17.041,25.706 17.214,25.966 17.474,26.139 17.78,26.2
  Top Copper region: 17.78,23.66 20.177,23.662 20.177,22.062 17.78,22.06 17.474,22.121 17.214,22.294 17.041,22.554 16.98,22.86 16.98,22.86 17.041,23.166 17.214,23.426 17.474,23.599 17.78,23.66
  Top Copper region: 17.78,21.12 20.177,21.122 20.177,19.522 17.78,19.52 17.474,19.581 17.214,19.754 17.041,20.014 16.98,20.32 16.98,20.32 17.041,20.626 17.214,20.886 17.474,21.059 17.78,21.12
  Top Copper region: 17.78,18.58 20.177,18.582 20.177,16.982 17.78,16.98 17.474,17.041 17.214,17.214 17.041,17.474 16.98,17.78 16.98,17.78 17.041,18.086 17.214,18.346 17.474,18.519 17.78,18.58
  Top Copper region: 17.78,16.04 20.177,16.042 20.177,14.442 17.78,14.44 17.474,14.501 17.214,14.674 17.041,14.934 16.98,15.24 16.98,15.24 17.041,15.546 17.214,15.806 17.474,15.979 17.78,16.04
  Top Copper region: 0,44.92 -2.397,44.918 -2.397,46.518 0,46.52 0.306,46.459 0.566,46.286 0.739,46.026 0.8,45.72 0.8,45.72 0.739,45.414 0.566,45.154 0.306,44.981 0,44.92
  Top Copper region: 0,42.38 -2.397,42.378 -2.397,43.978 0,43.98 0.306,43.919 0.566,43.746 0.739,43.486 0.8,43.18 0.8,43.18 0.739,42.874 0.566,42.614 0.306,42.441 0,42.38
  Top Copper region: 0,39.84 -2.397,39.838 -2.397,41.438 0,41.44 0.306,41.379 0.566,41.206 0.739,40.946 0.8,40.64 0.8,40.64 0.739,40.334 0.566,40.074 0.306,39.901 0,39.84
  Top Copper region: 0,37.3 -2.397,37.298 -2.397,38.898 0,38.9 0.306,38.839 0.566,38.666 0.739,38.406 0.8,38.1 0.8,38.1 0.739,37.794 0.566,37.534 0.306,37.361 0,37.3
  Top Copper region: 0,34.76 -2.397,34.758 -2.397,36.358 0,36.36 0.306,36.299 0.566,36.126 0.739,35.866 0.8,35.56 0.8,35.56 0.739,35.254 0.566,34.994 0.306,34.821 0,34.76
  Top Copper region: 0,32.22 -2.397,32.218 -2.397,33.818 0,33.82 0.306,33.759 0.566,33.586 0.739,33.326 0.8,33.02 0.8,33.02 0.739,32.714 0.566,32.454 0.306,32.281 0,32.22
  Top Copper region: 0,29.68 -2.397,29.678 -2.397,31.278 0,31.28 0.306,31.219 0.566,31.046 0.739,30.786 0.8,30.48 0.8,30.48 0.739,30.174 0.566,29.914 0.306,29.741 0,29.68
  Top Copper region: 0,16.98 -2.397,16.978 -2.397,18.578 0,18.58 0.306,18.519 0.566,18.346 0.739,18.086 0.8,17.78 0.8,17.78 0.739,17.474 0.566,17.214 0.306,17.041 0,16.98
  Top Copper region: 0,14.44 -2.397,14.438 -2.397,16.038 0,16.04 0.306,15.979 0.566,15.806 0.739,15.546 0.8,15.24 0.8,15.24 0.739,14.934 0.566,14.674 0.306,14.501 0,14.44
  Top Copper region: 0,11.9 -2.397,11.898 -2.397,13.498 0,13.5 0.306,13.439 0.566,13.266 0.739,13.006 0.8,12.7 0.8,12.7 0.739,12.394 0.566,12.134 0.306,11.961 0,11.9
  Top Copper region: 0,9.36 -2.397,9.358 -2.397,10.958 0,10.96 0.306,10.899 0.566,10.726 0.739,10.466 0.8,10.16 0.8,10.16 0.739,9.854 0.566,9.594 0.306,9.421 0,9.36
  Top Copper region: 0,6.82 -2.397,6.818 -2.397,8.418 0,8.42 0.306,8.359 0.566,8.186 0.739,7.926 0.8,7.62 0.8,7.62 0.739,7.314 0.566,7.054 0.306,6.881 0,6.82
  Top Copper region: 0,4.28 -2.397,4.278 -2.397,5.878 0,5.88 0.306,5.819 0.566,5.646 0.739,5.386 0.8,5.08 0.8,5.08 0.739,4.774 0.566,4.514 0.306,4.341 0,4.28
  Top Copper region: 0,1.74 -2.397,1.738 -2.397,3.338 0,3.34 0.306,3.279 0.566,3.106 0.739,2.846 0.8,2.54 0.8,2.54 0.739,2.234 0.566,1.974 0.306,1.801 0,1.74
  Top Copper region: 0,-0.8 -2.397,-0.802 -2.397,0.798 0,0.8 0.306,0.739 0.566,0.566 0.739,0.306 0.8,0 0.8,0 0.739,-0.306 0.566,-0.566 0.306,-0.739 0,-0.8
  Top Copper region: 17.78,3.34 20.177,3.342 20.177,1.742 17.78,1.74 17.474,1.801 17.214,1.974 17.041,2.234 16.98,2.54 16.98,2.54 17.041,2.846 17.214,3.106 17.474,3.279 17.78,3.34
  Top Copper region: 17.78,5.88 20.177,5.882 20.177,4.282 17.78,4.28 17.474,4.341 17.214,4.514 17.041,4.774 16.98,5.08 16.98,5.08 17.041,5.386 17.214,5.646 17.474,5.819 17.78,5.88
  Top Copper region: 17.78,8.42 20.177,8.422 20.177,6.822 17.78,6.82 17.474,6.881 17.214,7.054 17.041,7.314 16.98,7.62 16.98,7.62 17.041,7.926 17.214,8.186 17.474,8.359 17.78,8.42
  Top Copper region: 17.78,10.96 20.177,10.962 20.177,9.362 17.78,9.36 17.474,9.421 17.214,9.594 17.041,9.854 16.98,10.16 16.98,10.16 17.041,10.466 17.214,10.726 17.474,10.899 17.78,10.96
  Top Copper region: 17.78,13.5 20.177,13.502 20.177,11.902 17.78,11.9 17.474,11.961 17.214,12.134 17.041,12.394 16.98,12.7 16.98,12.7 17.041,13.006 17.214,13.266 17.474,13.439 17.78,13.5
  Bottom Copper region: 0,24.6 -2.397,24.598 -2.397,26.198 0,26.2 0.306,26.139 0.566,25.966 0.739,25.706 0.8,25.4 0.8,25.4 0.739,25.094 0.566,24.834 0.306,24.661 0,24.6
  Bottom Copper region: 0,19.52 -2.397,19.518 -2.397,21.118 0,21.12 0.306,21.059 0.566,20.886 0.739,20.626 0.8,20.32 0.8,20.32 0.739,20.014 0.566,19.754 0.306,19.581 0,19.52
  Bottom Copper region: 0,22.06 -2.397,22.058 -2.397,23.658 0,23.66 0.306,23.599 0.566,23.426 0.739,23.166 0.8,22.86 0.8,22.86 0.739,22.554 0.566,22.294 0.306,22.121 0,22.06
  Bottom Copper region: 0,27.14 -2.397,27.138 -2.397,28.738 0,28.74 0.306,28.679 0.566,28.506 0.739,28.246 0.8,27.94 0.8,27.94 0.739,27.634 0.566,27.374 0.306,27.201 0,27.14
  Bottom Copper region: 0,47.46 -2.397,47.458 -2.397,49.058 0,49.06 0.306,48.999 0.566,48.826 0.739,48.566 0.8,48.26 0.8,48.26 0.739,47.954 0.566,47.694 0.306,47.521 0,47.46
  Bottom Copper region: 17.78,0.8 20.177,0.802 20.177,-0.798 17.78,-0.8 17.474,-0.739 17.214,-0.566 17.041,-0.306 16.98,0 16.98,0 17.041,0.306 17.214,0.566 17.474,0.739 17.78,0.8
  Bottom Copper region: 17.78,49.06 20.177,49.062 20.177,47.462 17.78,47.46 17.474,47.521 17.214,47.694 17.041,47.954 16.98,48.26 16.98,48.26 17.041,48.566 17.214,48.826 17.474,48.999 17.78,49.06
  Bottom Copper region: 17.78,46.52 20.177,46.522 20.177,44.922 17.78,44.92 17.474,44.981 17.214,45.154 17.041,45.414 16.98,45.72 16.98,45.72 17.041,46.026 17.214,46.286 17.474,46.459 17.78,46.52
  Bottom Copper region: 17.78,43.98 20.177,43.982 20.177,42.382 17.78,42.38 17.474,42.441 17.214,42.614 17.041,42.874 16.98,43.18 16.98,43.18 17.041,43.486 17.214,43.746 17.474,43.919 17.78,43.98
  Bottom Copper region: 17.78,41.44 20.177,41.442 20.177,39.842 17.78,39.84 17.474,39.901 17.214,40.074 17.041,40.334 16.98,40.64 16.98,40.64 17.041,40.946 17.214,41.206 17.474,41.379 17.78,41.44
  Bottom Copper region: 17.78,38.9 20.177,38.902 20.177,37.302 17.78,37.3 17.474,37.361 17.214,37.534 17.041,37.794 16.98,38.1 16.98,38.1 17.041,38.406 17.214,38.666 17.474,38.839 17.78,38.9
  Bottom Copper region: 17.78,36.36 20.177,36.362 20.177,34.762 17.78,34.76 17.474,34.821 17.214,34.994 17.041,35.254 16.98,35.56 16.98,35.56 17.041,35.866 17.214,36.126 17.474,36.299 17.78,36.36
  Bottom Copper region: 17.78,33.82 20.177,33.822 20.177,32.222 17.78,32.22 17.474,32.281 17.214,32.454 17.041,32.714 16.98,33.02 16.98,33.02 17.041,33.326 17.214,33.586 17.474,33.759 17.78,33.82
  Bottom Copper region: 17.78,31.28 20.177,31.282 20.177,29.682 17.78,29.68 17.474,29.741 17.214,29.914 17.041,30.174 16.98,30.48 16.98,30.48 17.041,30.786 17.214,31.046 17.474,31.219 17.78,31.28
  Bottom Copper region: 17.78,28.74 20.177,28.742 20.177,27.142 17.78,27.14 17.474,27.201 17.214,27.374 17.041,27.634 16.98,27.94 16.98,27.94 17.041,28.246 17.214,28.506 17.474,28.679 17.78,28.74
  Bottom Copper region: 17.78,26.2 20.177,26.202 20.177,24.602 17.78,24.6 17.474,24.661 17.214,24.834 17.041,25.094 16.98,25.4 16.98,25.4 17.041,25.706 17.214,25.966 17.474,26.139 17.78,26.2
  Bottom Copper region: 17.78,23.66 20.177,23.662 20.177,22.062 17.78,22.06 17.474,22.121 17.214,22.294 17.041,22.554 16.98,22.86 16.98,22.86 17.041,23.166 17.214,23.426 17.474,23.599 17.78,23.66
  Bottom Copper region: 17.78,21.12 20.177,21.122 20.177,19.522 17.78,19.52 17.474,19.581 17.214,19.754 17.041,20.014 16.98,20.32 16.98,20.32 17.041,20.626 17.214,20.886 17.474,21.059 17.78,21.12
  Bottom Copper region: 17.78,18.58 20.177,18.582 20.177,16.982 17.78,16.98 17.474,17.041 17.214,17.214 17.041,17.474 16.98,17.78 16.98,17.78 17.041,18.086 17.214,18.346 17.474,18.519 17.78,18.58
  Bottom Copper region: 17.78,16.04 20.177,16.042 20.177,14.442 17.78,14.44 17.474,14.501 17.214,14.674 17.041,14.934 16.98,15.24 16.98,15.24 17.041,15.546 17.214,15.806 17.474,15.979 17.78,16.04
  Bottom Copper region: 0,44.92 -2.397,44.918 -2.397,46.518 0,46.52 0.306,46.459 0.566,46.286 0.739,46.026 0.8,45.72 0.8,45.72 0.739,45.414 0.566,45.154 0.306,44.981 0,44.92
  Bottom Copper region: 0,42.38 -2.397,42.378 -2.397,43.978 0,43.98 0.306,43.919 0.566,43.746 0.739,43.486 0.8,43.18 0.8,43.18 0.739,42.874 0.566,42.614 0.306,42.441 0,42.38
  Bottom Copper region: 0,39.84 -2.397,39.838 -2.397,41.438 0,41.44 0.306,41.379 0.566,41.206 0.739,40.946 0.8,40.64 0.8,40.64 0.739,40.334 0.566,40.074 0.306,39.901 0,39.84
  Bottom Copper region: 0,37.3 -2.397,37.298 -2.397,38.898 0,38.9 0.306,38.839 0.566,38.666 0.739,38.406 0.8,38.1 0.8,38.1 0.739,37.794 0.566,37.534 0.306,37.361 0,37.3
  Bottom Copper region: 0,34.76 -2.397,34.758 -2.397,36.358 0,36.36 0.306,36.299 0.566,36.126 0.739,35.866 0.8,35.56 0.8,35.56 0.739,35.254 0.566,34.994 0.306,34.821 0,34.76
  Bottom Copper region: 0,32.22 -2.397,32.218 -2.397,33.818 0,33.82 0.306,33.759 0.566,33.586 0.739,33.326 0.8,33.02 0.8,33.02 0.739,32.714 0.566,32.454 0.306,32.281 0,32.22
  Bottom Copper region: 0,29.68 -2.397,29.678 -2.397,31.278 0,31.28 0.306,31.219 0.566,31.046 0.739,30.786 0.8,30.48 0.8,30.48 0.739,30.174 0.566,29.914 0.306,29.741 0,29.68
  Bottom Copper region: 0,16.98 -2.397,16.978 -2.397,18.578 0,18.58 0.306,18.519 0.566,18.346 0.739,18.086 0.8,17.78 0.8,17.78 0.739,17.474 0.566,17.214 0.306,17.041 0,16.98
  Bottom Copper region: 0,14.44 -2.397,14.438 -2.397,16.038 0,16.04 0.306,15.979 0.566,15.806 0.739,15.546 0.8,15.24 0.8,15.24 0.739,14.934 0.566,14.674 0.306,14.501 0,14.44
  Bottom Copper region: 0,11.9 -2.397,11.898 -2.397,13.498 0,13.5 0.306,13.439 0.566,13.266 0.739,13.006 0.8,12.7 0.8,12.7 0.739,12.394 0.566,12.134 0.306,11.961 0,11.9
  Bottom Copper region: 0,9.36 -2.397,9.358 -2.397,10.958 0,10.96 0.306,10.899 0.566,10.726 0.739,10.466 0.8,10.16 0.8,10.16 0.739,9.854 0.566,9.594 0.306,9.421 0,9.36
  Bottom Copper region: 0,6.82 -2.397,6.818 -2.397,8.418 0,8.42 0.306,8.359 0.566,8.186 0.739,7.926 0.8,7.62 0.8,7.62 0.739,7.314 0.566,7.054 0.306,6.881 0,6.82
  Bottom Copper region: 0,4.28 -2.397,4.278 -2.397,5.878 0,5.88 0.306,5.819 0.566,5.646 0.739,5.386 0.8,5.08 0.8,5.08 0.739,4.774 0.566,4.514 0.306,4.341 0,4.28
  Bottom Copper region: 0,1.74 -2.397,1.738 -2.397,3.338 0,3.34 0.306,3.279 0.566,3.106 0.739,2.846 0.8,2.54 0.8,2.54 0.739,2.234 0.566,1.974 0.306,1.801 0,1.74
  Bottom Copper region: 0,-0.8 -2.397,-0.802 -2.397,0.798 0,0.8 0.306,0.739 0.566,0.566 0.739,0.306 0.8,0 0.8,0 0.739,-0.306 0.566,-0.566 0.306,-0.739 0,-0.8
  Bottom Copper region: 17.78,3.34 20.177,3.342 20.177,1.742 17.78,1.74 17.474,1.801 17.214,1.974 17.041,2.234 16.98,2.54 16.98,2.54 17.041,2.846 17.214,3.106 17.474,3.279 17.78,3.34
  Bottom Copper region: 17.78,5.88 20.177,5.882 20.177,4.282 17.78,4.28 17.474,4.341 17.214,4.514 17.041,4.774 16.98,5.08 16.98,5.08 17.041,5.386 17.214,5.646 17.474,5.819 17.78,5.88
  Bottom Copper region: 17.78,8.42 20.177,8.422 20.177,6.822 17.78,6.82 17.474,6.881 17.214,7.054 17.041,7.314 16.98,7.62 16.98,7.62 17.041,7.926 17.214,8.186 17.474,8.359 17.78,8.42
  Bottom Copper region: 17.78,10.96 20.177,10.962 20.177,9.362 17.78,9.36 17.474,9.421 17.214,9.594 17.041,9.854 16.98,10.16 16.98,10.16 17.041,10.466 17.214,10.726 17.474,10.899 17.78,10.96
  Bottom Copper region: 17.78,13.5 20.177,13.502 20.177,11.902 17.78,11.9 17.474,11.961 17.214,12.134 17.041,12.394 16.98,12.7 16.98,12.7 17.041,13.006 17.214,13.266 17.474,13.439 17.78,13.5
  Keep-Out Layer board cut-out: 15.893,-1.372 1.893,-1.372 1.893,7.628 15.893,7.628
  silkscreen extent -3.4,-1.37 19.39,49.63, body extent -1.61,-1.37 19.39,50.93, height 3.6
MOLX-22-28-4033_V [mm] "THD, 3-Leads, Body 7.62x2.49mm, Pitch 2.54mm"
  rect 1.55x1.55 hole 1.02: 1(-2.54,0)
  round 1.55 hole 1.02: 2(0,0) 3(2.54,0)
  silkscreen extent -4.58,-1.24 3.81,1.24, body extent -3.81,-1.24 3.81,1.24, height 8.38
MOLX-5033981892_V [mm] "CONN, 8-Leads, Body 14.05x13.2mm, Pitch 1.1mm"
  rrect20% 0.7x1.1 smd mask+0.05: 1(-2.38,6.27) 2(-1.28,6.27) 3(-0.18,6.27) 4(0.92,6.27) 5(2.02,6.27) 6(3.12,6.27) 7(4.22,6.27) 8(5.32,6.27)
  rrect20% 1.05x0.78 smd mask+0.05: 9(0.095,-6.27)
  rrect20% 0.9x0.93 smd mask+0.05: 10(-4.17,-6.195)
  rrect20% 0.86x2.8 smd mask+0.05: 11(6.4,5.77)
  rrect20% 0.7x3.3 smd mask+0.05: 12(6.48,-5.01)
  rrect25% 0.7x3.3 smd mask+0.05: 13(-6.48,-5.01)
  rrect20% 1.04x1.83 smd mask+0.05: 14(-6.21,6.255)
  Top Copper keep-out region: -3.22,-5.73 -2.67,-5.73 -2.67,-6.28 -3.22,-6.28
  Top Copper keep-out region: -5.235,-3.93 -4.685,-3.93 -4.685,-6.08 -5.235,-6.08
  Top Copper keep-out region: -6.83,1.77 -6.13,1.77 -6.13,-0.63 -6.83,-0.63
  Top Copper keep-out region: 6.83,4.191 6.83,-3.23 5.969,-3.23 5.969,-5.715 -0.635,-5.715 -0.635,-6.66 -1.73,-6.66 -1.73,-4.48 0.57,-4.48 0.57,-3.23 -3.82,-3.23 -3.82,-0.63 -3.17,-0.63 -3.17,4.191
  silkscreen extent -6.6,-6.38 6.6,7.5, body extent -6.55,-6.38 6.55,7.67, height 1.28
"New footprint 1"#1 [mm]
  round 1.6 hole 1.1: 1(-3.81,0) 2(-1.27,0) 3(1.27,0) 4(3.81,0)
  silkscreen extent -13.75,-25.8 13.75,2, body extent -13.32,-25.49 13.38,2.37, height 5.47
"New footprint 1"#2 [mm]
  rect 1.651x1.651 hole 0.889: 1(-11.43,8.89) 16(11.43,8.89)
  round 1.651 hole 0.889: 2(-11.43,6.35) 3(-11.43,3.81) 4(-11.43,1.27) 5(-11.43,-1.27) 6(-11.43,-3.81) 7(-11.43,-6.35) 8(-11.43,-8.89) 9(11.43,-8.89) 10(11.43,-6.35) 11(11.43,-3.81) 12(11.43,-1.27) 13(11.43,1.27) 14(11.43,3.81) 15(11.43,6.35)
  silkscreen extent -13.97,-15.24 13.97,14.84, body extent -12.62,-12.72 12.8,10.18, height 11.01
ONSC-SOT-23-3-318-08_V [mm] "SOT23, 3-Leads, Body 2.92x1.3mm, Pitch 0.95mm"
  rect 0.9x0.8 smd: 1(-1,0.95) 2(-1,-0.95) 3(1,0)
  silkscreen extent -1.12,-1.46 0.65,2.03, body extent -1.28,-1.5 1.28,1.5, height 1.15
QFN40P410X410X60_HS-29N [mm] "QFN, 28-Leads, Body 4,10x4,10mm, Pitch 0,40mm, Thermal Pad 2,65x2,65mm, IPC Medium Density"
  oval 0.85x0.2 smd mask+0.05: 1(-1.975,1.2) 2(-1.975,0.8) 3(-1.975,0.4) 4(-1.975,0) 5(-1.975,-0.4) 6(-1.975,-0.8) 7(-1.975,-1.2) 15(1.975,-1.2) 16(1.975,-0.8) 17(1.975,-0.4) 18(1.975,0) 19(1.975,0.4) 20(1.975,0.8) 21(1.975,1.2)
  oval 0.2x0.85 smd mask+0.05: 8(-1.2,-1.975) 9(-0.8,-1.975) 10(-0.4,-1.975) 11(0,-1.975) 12(0.4,-1.975) 13(0.8,-1.975) 14(1.2,-1.975) 22(1.2,1.975) 23(0.8,1.975) 24(0.4,1.975) 25(0,1.975) 26(-0.4,1.975) 27(-0.8,1.975) 28(-1.2,1.975)
  rect 2.65x2.65 smd mask+0.05: 29(0,0)
  silkscreen extent -2.97,-2.2 2.2,2.2, body extent -2.07,-2.07 2.07,2.07, height 0.6
QFN50P300X250X81-14N [mm] "QFN, 14-Leads, Body 3,00x2,50mm, Pitch 0,50mm, IPC Medium Density"
  oval 0.95x0.25 smd mask+0.02: 1(-1.35,0.75) 2(-1.35,0.25) 3(-1.35,-0.25) 4(-1.35,-0.75) 8(1.35,-0.75) 9(1.35,-0.25) 10(1.35,0.25) 11(1.35,0.75)
  oval 0.25x0.95 smd mask+0.02: 5(-0.5,-1.1) 6(0,-1.1) 7(0.5,-1.1) 12(0.5,1.1) 13(0,1.1) 14(-0.5,1.1)
  silkscreen extent -2.45,-1.42 1.68,1.43, body extent -1.63,-1.38 1.63,1.38, height 0.81
QFN80P150X150X55-4N [mm] "QFN, 4-Leads, Body 1,50x1,50mm, Pitch 0,80mm, IPC Medium Density"
  rect 0.6x0.3 smd mask+0.05: 1(-0.7,0.4) 2(-0.7,-0.4) 3(0.7,-0.4) 4(0.7,0.4)
  silkscreen extent -1.25,-0.9 0.9,1.05, body extent -0.85,-0.75 0.85,0.76, height 0.55
RESC0603(1608)_L [mm] "Chip Resistor, Body 1.6x0.8mm, IPC High Density"
  rrect25% 0.66x0.76 smd: 1(-0.7,0) 2(0.7,0)
  silkscreen extent 0,-0.3 0,0.3, body extent -0.8,-0.4 0.8,0.4, height 0.45
SON50P130X60-8N [mm] "SON, 8-Leads, Body 2,20x1,30mm, Pitch 0,50mm, IPC Medium Density"
  rect 0.72x0.3 smd mask+0.05: 1(-0.86,0.75) 2(-0.86,0.25) 3(-0.86,-0.25) 4(-0.86,-0.75) 5(0.86,-0.75) 6(0.86,-0.25) 7(0.86,0.25) 8(0.86,0.75)
  silkscreen extent -1.1,-1.25 0.65,1.3, body extent -0.95,-1.06 0.95,1.06, height 0.55
SOT65P200X110-5N [mm] "SOT23, 5-Leads, Body 2,00x2,00mm, Pitch 0,65mm, IPC Medium Density"
  rect 0.8x0.4 smd mask+0.02: 1(-1.075,0.65) 2(-1.075,0) 3(-1.075,-0.65) 4(1.075,-0.65) 5(1.075,0.65)
  silkscreen extent -1.2,-1.1 0.3,1.52, body extent -1.2,-1.1 1.2,1.1, height 1.1
TECO-640456-2_V [mm] "HDR, 2-Leads, Body 5.715x5.08mm, Pitch 2.54mm"
  rect 1.8x1.8 hole 1.3: 1(1.27,0)
  round 1.8 hole 1.3: 2(-1.27,0)
  silkscreen extent -2.54,-2.54 3.26,3.17, body extent -2.54,-2.67 2.54,3.17, height 9.4
TECO-FSM4JSMA_V [mm] "SMD, 4-Leads, Body 6x6mm, Pitch 4.5mm"
  rect 1.4x2.1 smd: 1(2.25,4.55) 2(2.25,-4.55) 3(-2.25,4.55) 4(-2.25,-4.55)
  silkscreen extent -3,-3 3.62,4.68, body extent -3,-5 3,5, height 5.08
TP06R [mm] "Testpoint, round, d=0.6mm"
  round 0.6 smd paste-1: 1(0,0)